# Altium PCB PCB_INST_FONTE.PcbDoc
Units mil, origin at the board's own origin, x right, y up, seen from the top; angles counter-clockwise.
Board outline 2800 x 3030 mil, 2 copper layers (Top Layer, Bottom Layer); 53 components, 31 nets, 151 pads, 6 vias.
Unrouted connection lines stored in the file: 1.
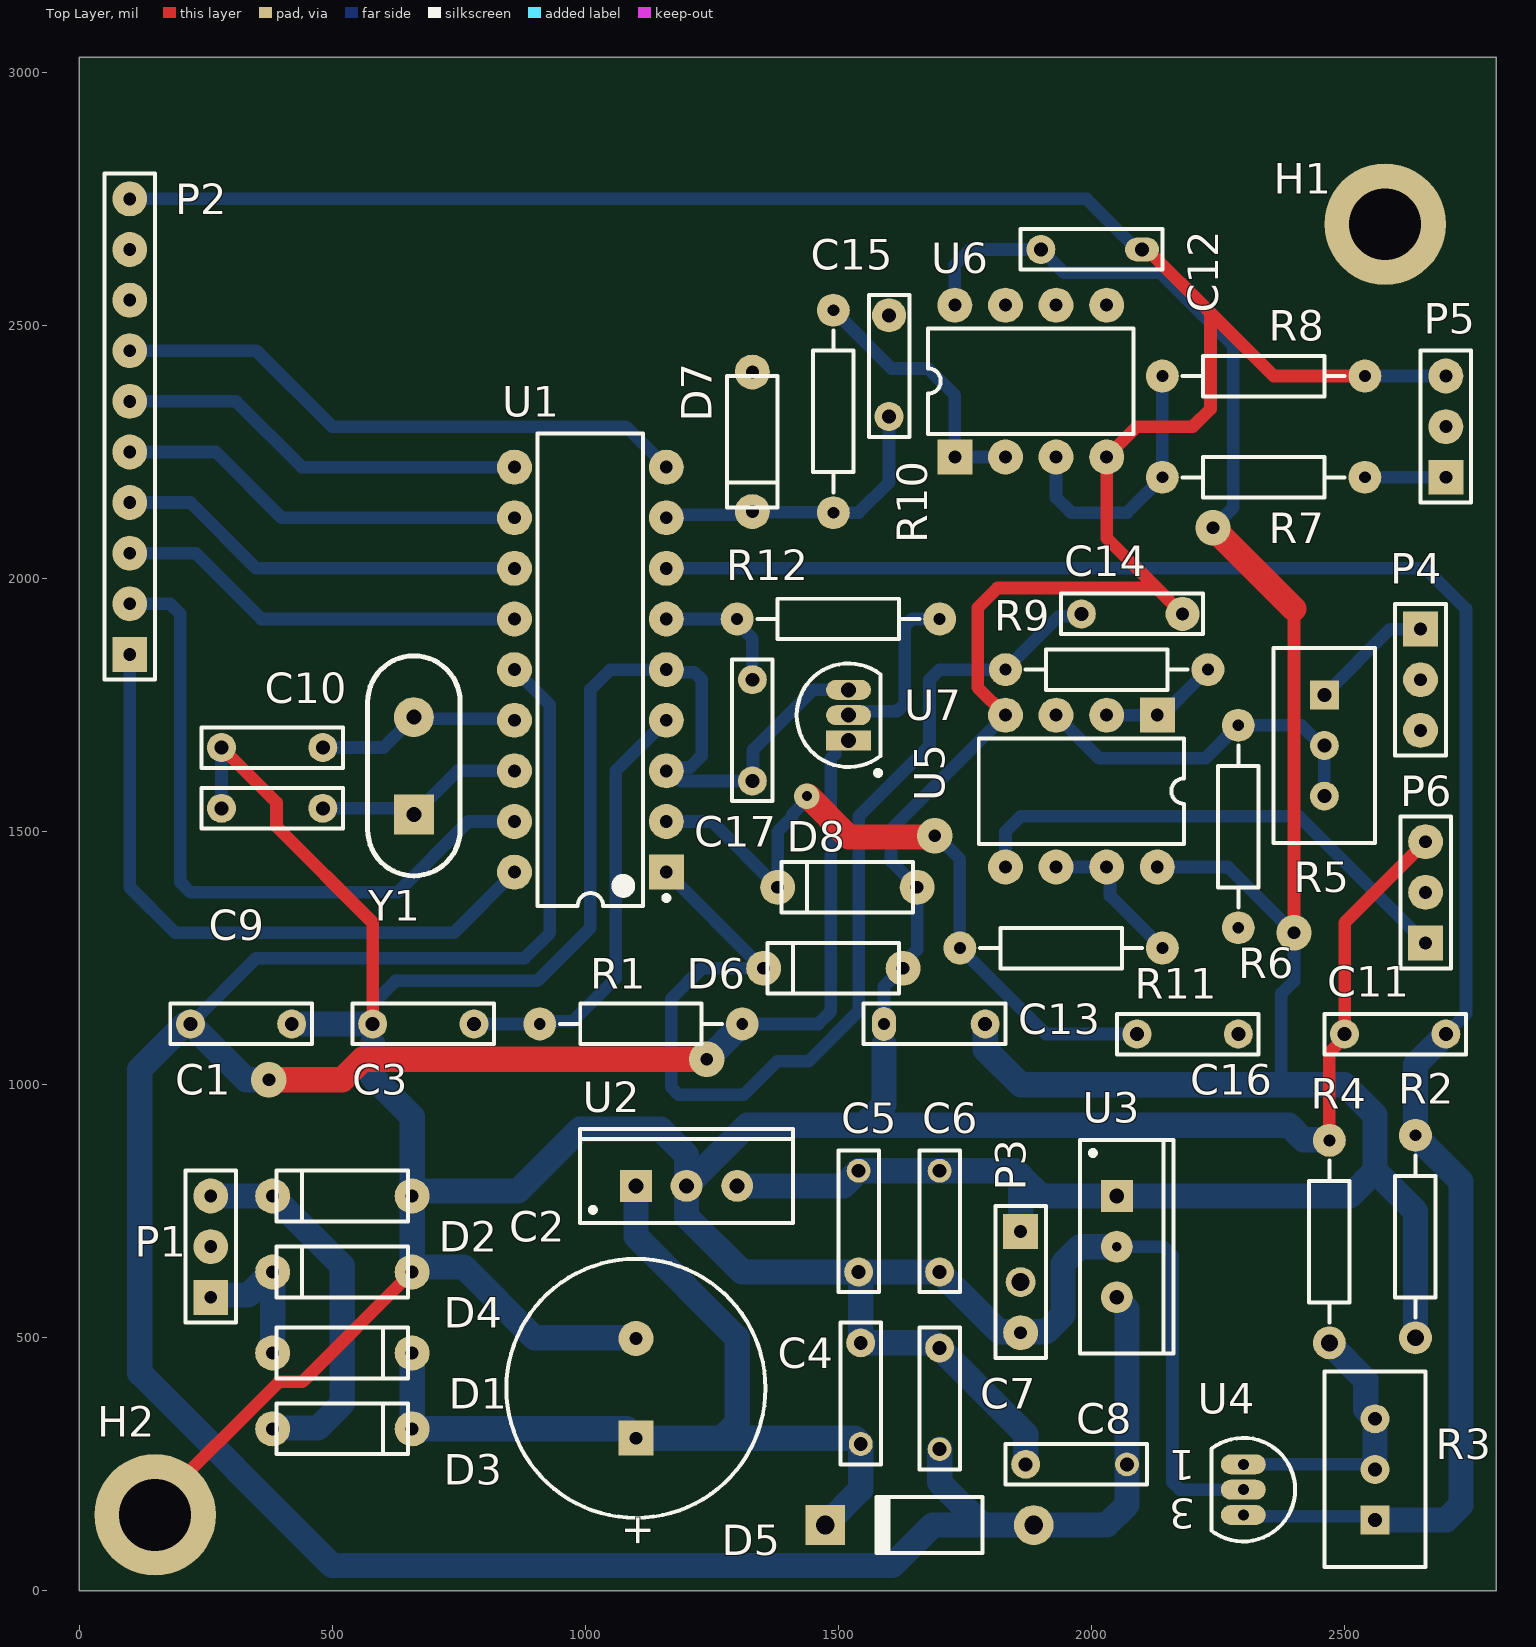
[diagram p0: Top Layer view]
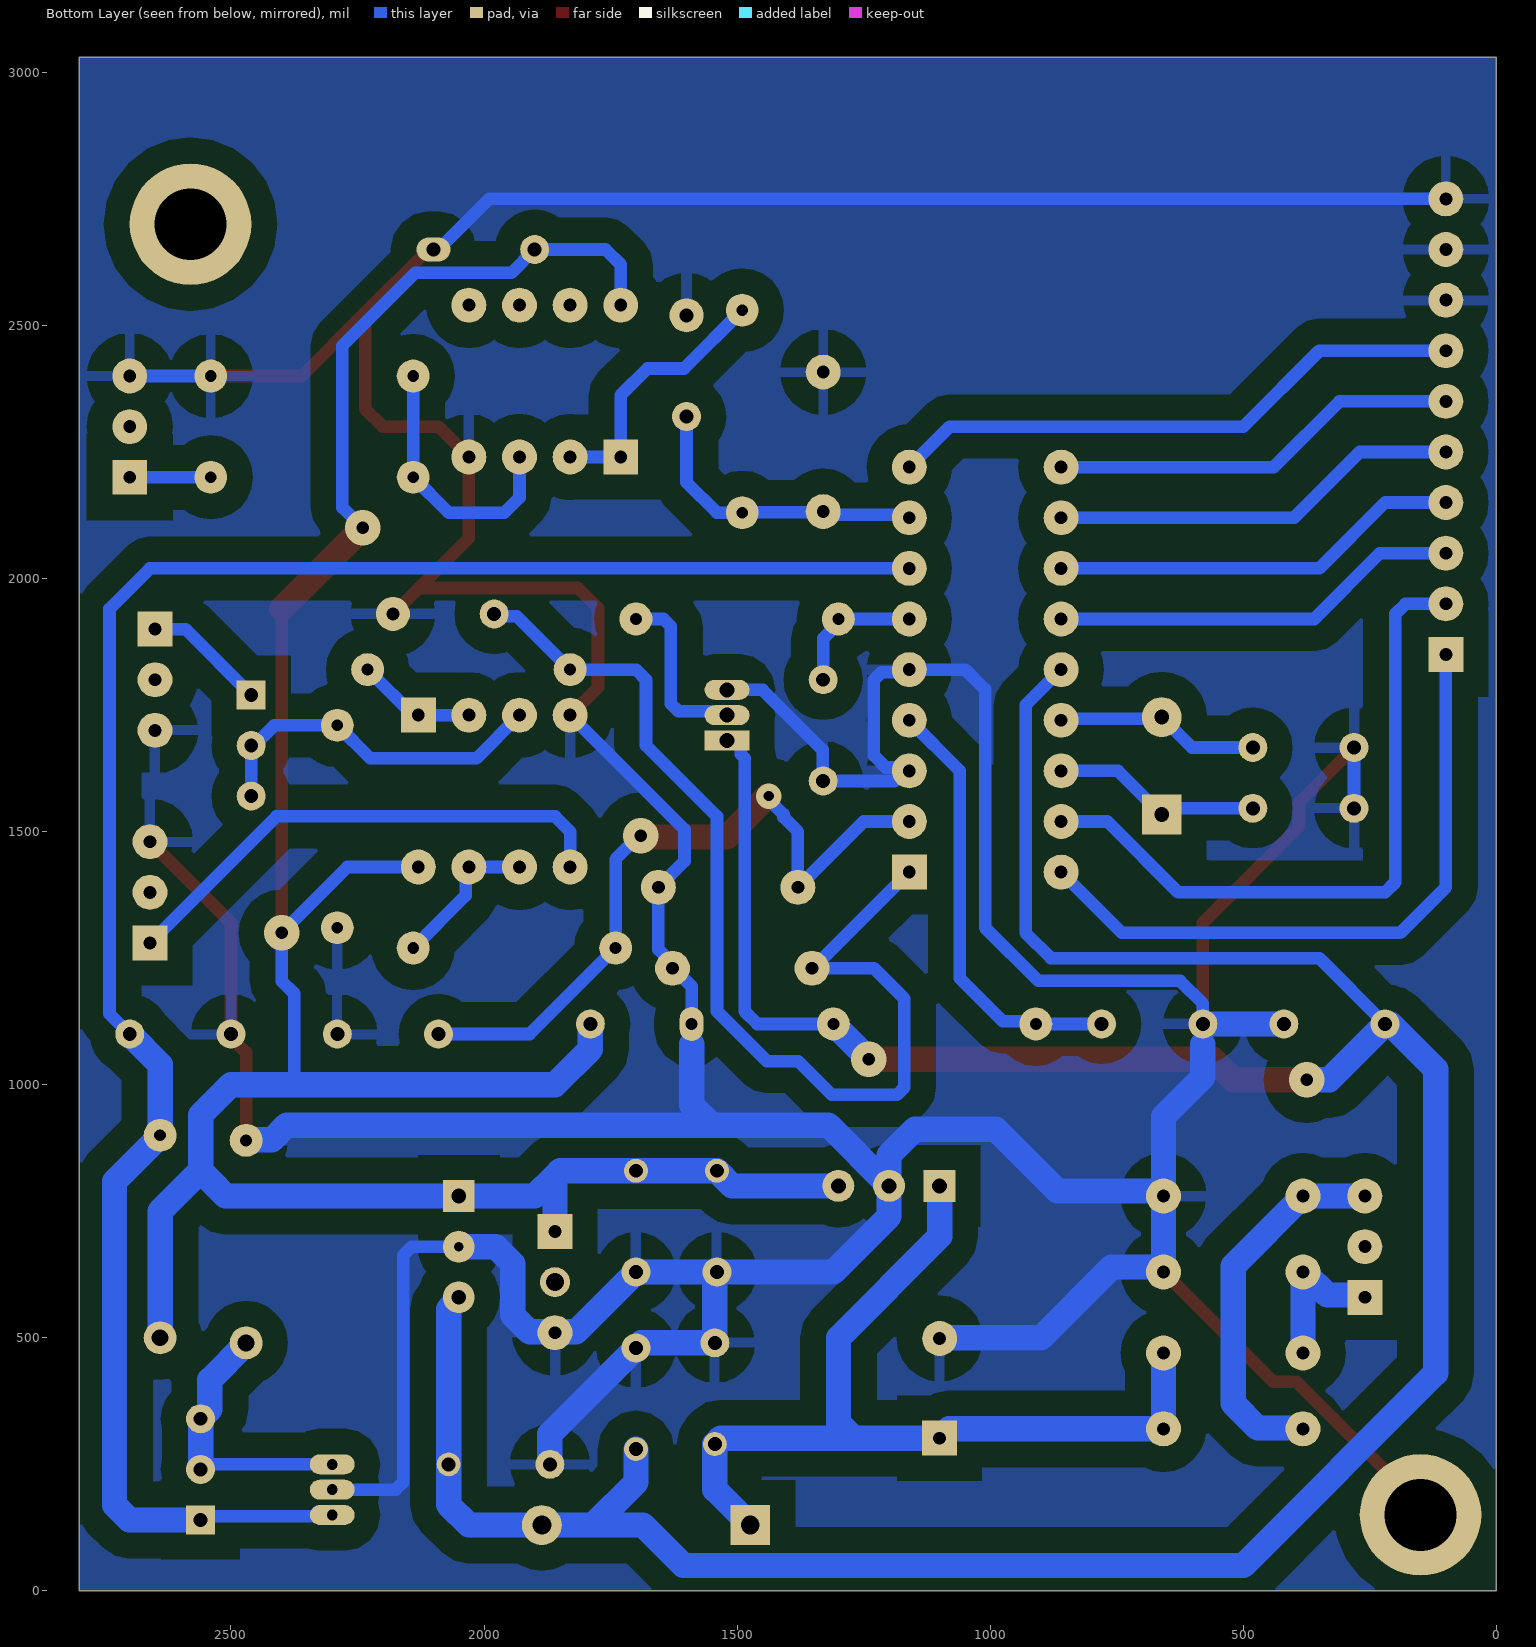
[diagram p1: Bottom Layer view, seen from below]
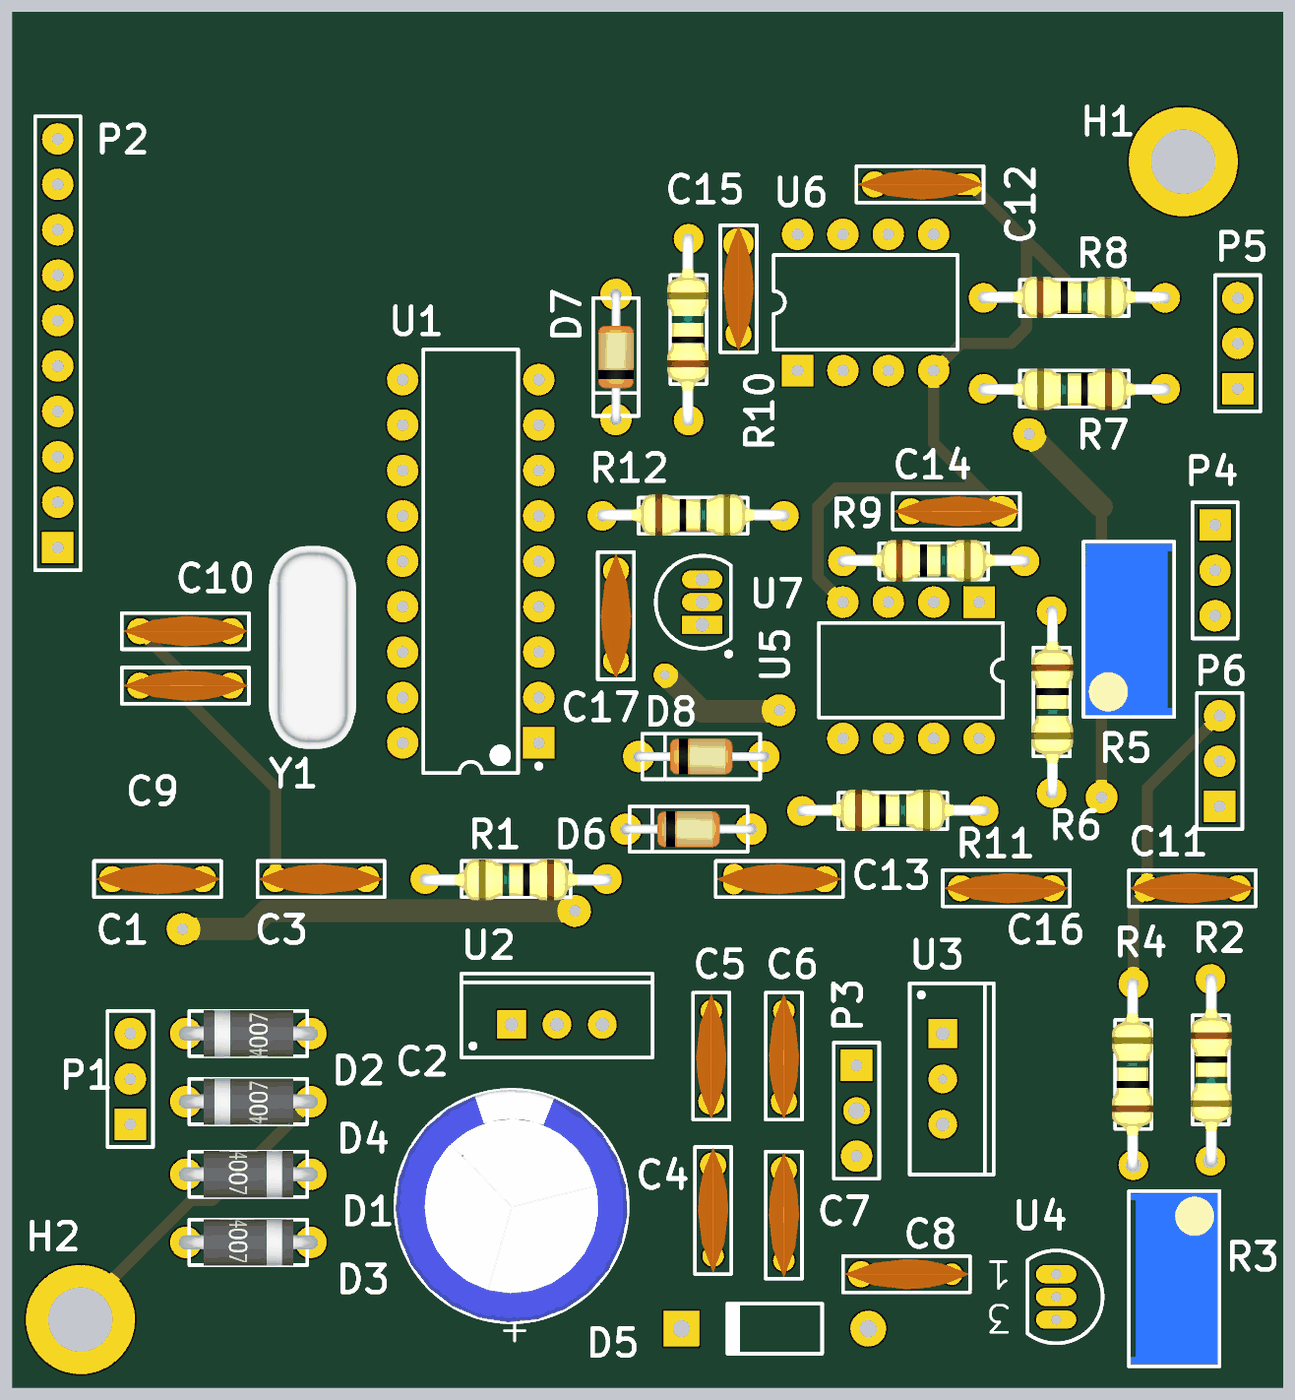
[diagram p2: 3D render of the assembled board from above, using the file's embedded part models]

## Layer stack, top to bottom
Top Solder: solder mask 0.4, Solder Resist, Dk 3.5
Top Layer: signal copper 1.4
Dielectric 1: dielectric 12.6, FR-4, Dk 4.8
Bottom Layer: signal copper 1.4
Bottom Solder: solder mask 0.4, Solder Resist, Dk 3.5

## Board outline
0,0 2800,0 2800,3030 0,3030

## Design rules (kind name [scope] priority, off if disabled: settings)
Clearance [All] p1: gap=10 ignorepadtopadclearanceinfootprint=FALSE except(50: Arc-Poly Track-Poly SMDPad-Poly THPad-Poly Via-Poly Fill-Poly Poly-Poly)
HoleSize [All] p1: absolutevalues=TRUE maxlimit=1000 minlimit=1 maxpercent=80.000 minpercent=20.000
MinimumSolderMaskSliver [All] p1 off: minsoldermaskwidth=10
PlaneClearance PlaneClearance_1 [All] p1: clearance=20
PlaneClearance [All] p2: clearance=50
PolygonConnect [All] p1: connectstyle=Relief reliefconductorwidth=20 reliefentries=4 polygonreliefangle="90 Angle" airgapwidth=50
RoutingCorners [All] p1: cornerstyle=45-Degree minsetback=25 maxsetback=25
RoutingVias [All] p1: holewidth=25 width=50 viastyle="Through Hole" minholewidth=10 minwidth=20 maxholewidth=50 maxwidth=100
SilkToSolderMaskClearance [IsPad] p1 off: minsilkscreentomaskgap=4 clearancetoexposedcopper=TRUE
SolderMaskExpansion [All] p1: expansion=4 istentingtop=FALSE
Width [All] p1: maxlimit=50 minlimit=10 preferedwidth=25
25 further rules are at their usual default settings.

## Classes and differential pairs
net class PowerNets: +12 "AD ref" GND NetC2_1 NetD1_1 NetD3_1 NetR3_2 VCC
component class U_Sheet2: C12 C13 C14 C15 C16 C17 D6 D7 D8 P4 P5 P6 R5 R6 R7 R8 R9 R10 R11 R12 U5 U7
component class U_Sheet1: C1 C2 C3 C4 C5 C6 C7 C8 C9 C10 C11 D1 D2 D3 D4 D5 H1 H2 P1 P2 P3 R1 R2 R3 R4 U2 U3 U4 Y1

## Components (designator, comment, footprint, x,y, rotation, side; value= is the part's Value field where it differs from the comment)
C1 "100nF" RAD-0.2#1 320,1120 r0 top value=1
C2 "2200 uF @25V" CAPPR5-13x21 1100,400 r90 top
C3 "100nF" RAD-0.2#1 680,1120 r180 top value=1
C4 "330nF" RAD-0.2#2 1544.09,390 r90 top value=1
C5 "100nF" RAD-0.2#2 1540,730 r270 top value=1
C6 "330nF" RAD-0.2#2 1700,730 r270 top value=1
C7 "100nF" RAD-0.2#2 1700,380 r90 top value=1
C8 "22pF" RAD-0.2#3 1970,250 r0 top value=1
C9 "22pF" RAD-0.2#1 381.34,1546.06 r0 top value=1
C10 "22pF" RAD-0.2#1 381.34,1666.06 r0 top value=1
C11 "100nF" RAD-0.2#1 2600,1100 r180 top value=1
C12 "100n" RAD-0.2#4 2000,2650 r0 top value=1
C13 "100n" RAD-0.2#5 1690,1120 r180 top value=1
C14 "100n" RAD-0.2#6 2080,1930 r0 top value=1
C15 "100n" RAD-0.2#7 1600,2420 r90 top value=1
C16 "100n" RAD-0.2#1 2190,1100 r0 top value=1
C17 "100n" RAD-0.2#1 1330,1700 r270 top value=1
D1 "1N4007" DIODE-1N400X 520,470 r0 top
D2 "1N4007" DIODE-1N400X 520,630 r180 top
D3 "1N4007" DIODE-1N400X 520,320 r0 top
D4 "1N4007" DIODE-1N400X 520,780 r180 top
D5 "1N4007" DO-41 1680,130 r180 top
D6 "1N4733" DIODE-SIGNAL 1490,1230 r180 top
D7 "1N4733" DIODE-SIGNAL 1330,2270 r270 top
D8 "1N4733" DIODE-SIGNAL 1517.8,1390 r180 top
H1 "Hole" HOLE_M3 2580,2700 r0 top
H2 "Hole" HOLE_M3 150,150 r0 top
P1 "AC(IN)" HDR1X3#1 260,580 r90 top
P2 "LCD 16x2" HDR1X10 100,1850 r90 top
P3 "FAN" HDR1X3#2 1860,710 r270 top
P4 "V var" HDR1X3#1 2650,1900 r270 top
P5 "V fixed" HDR1X3#1 2700,2200 r90 top
P6 "ACS712" HDR1X3#1 2660,1280 r90 top
R1 "4k7" AXIAL-0.4#1 1110,1120 r0 top value=0
R2 "150r" AXIAL-0.4#2 2640,700 r90 top value=0
R3 "24k" VR1 2560,240 r90 top
R4 "12k" AXIAL-0.4#3 2470,690 r270 top value=0
R5 "100k" VR1 2460,1670 r270 top
R6 "6k8" AXIAL-0.4#1 2290,1510 r90 top value=0
R7 "100k" AXIAL-0.4#1 2340,2200 r0 top value=0
R8 "12k" AXIAL-0.4#1 2340,2400 r180 top value=0
R9 "1k" AXIAL-0.4#1 2030,1820 r180 top value=0
R10 "1k" AXIAL-0.4#1 1490,2330 r270 top value=0
R11 "1k" AXIAL-0.4#1 1940,1270 r180 top value=0
R12 "100" AXIAL-0.4#1 1500,1920 r180 top value=0
U1 "PIC18F1220-I/P" PDIP300-P18 1010,1820 r180 top
U2 "LM7812" T03B#1 1200,800 r0 top
U3 "LM7805" T03B#2 2050,680 r270 top
U4 "TL431ACLP" LP03 2300,200 r180 top
U5 "LM358AJG" JG008 1980,1580 r180 top
U6 "LM358AJG" JG008 1880,2390 r0 top
U7 "LM35CAZ" Z03A 1520,1730 r0 top
Y1 "10MHz" CRYSTAL-HC49S 661.34,1533.94 r180 top

## Footprints (in the part's own frame and the unit in brackets; to place one, negate y for a bottom-side part, rotate by r counter-clockwise, add the part's x,y. Pads: shape width x height; smd on the part's side, far side on the other; paste and mask are expansions set on the pad)
AXIAL-0.4#1 [mil]
  round 65.12 hole 23.46: 1(-200,0) 2(200,0)
  silkscreen extent -160,-40 160,40, body extent -212,-47 212,44, height 112
AXIAL-0.4#2 [mil]
  round 65.12 hole 33.46: 1(-200,0)
  round 65.12 hole 23.46: 2(200,0)
  silkscreen extent -160,-40 160,40, body extent -212,-47 212,44, height 112
AXIAL-0.4#3 [mil]
  round 65.12 hole 23.46: 1(-200,0)
  round 65.12 hole 33.46: 2(200,0)
  silkscreen extent -160,-40 160,40, body extent -212,-47 212,44, height 112
CAPPR5-13x21 [mil] "Capacitor, Electrolytic, Radial; Body 13 x 21 mm (Dia.xH typ)"
  rect 69.06x69.06 hole 25.43: 1(-98.43,0)
  round 69.06 hole 25.43: 2(98.43,0)
  silkscreen extent -256,-256 256,256, body extent -256,-256 256,256, height 835
CRYSTAL-HC49S [mm]
  rect 2x2 hole 0.746: 1(0,0)
  round 2 hole 0.746: 2(0,-4.88)
  silkscreen extent -2.32,-7.96 2.32,3.08, body extent -2.34,-8.12 2.31,3.23, height 3.52
DIODE-1N400X [mm]
  round 1.754 hole 0.646: 1(-3.5,0) 2(3.5,0)
  silkscreen extent -3.3,-1.27 3.3,1.27, body extent -3.9,-1.31 3.9,1.31, height 2.81
DIODE-SIGNAL [mm]
  round 1.754 hole 0.646: 1(-3.5,0) 2(3.5,0)
  silkscreen extent -3.3,-1.27 3.3,1.27, body extent -3.75,-1 3.75,1, height 2.2
DO-41 [mm] "Diode, Axial; Body 5.2 x 2.7 mm (LxDia. max), Lead Dia. 0.86 mm (max)"
  round 2 hole 0.946: 1(-5.23,0)
  rect 2x2 hole 0.946: 2(5.23,0)
  silkscreen extent -2.65,-1.4 2.75,1.4
HDR1X3#1 [mil] "Connector; Header; 3 Position"
  rect 69.06x69.06 hole 25.43: 1(0,0)
  round 69.06 hole 25.43: 2(100,0) 3(200,0)
  silkscreen extent -50,-50 250,50
HDR1X3#2 [mil] "Connector; Header; 3 Position"
  rect 69.06x69.06 hole 25.43: 1(0,0)
  round 59.06 hole 35.43: 2(100,0)
  round 69.06 hole 25.43: 3(200,0)
  silkscreen extent -50,-50 250,50
HDR1X10 [mil] "Connector; Header; 10 Position"
  rect 69.06x69.06 hole 25.43: 1(0,0)
  round 69.06 hole 25.43: 2(100,0) 3(200,0) 4(300,0) 5(400,0) 6(500,0) 7(600,0) 8(700,0) 9(800,0) 10(900,0)
  silkscreen extent -50,-50 950,50
HOLE_M3 [mm]
  round 6.1 hole 3.6: 1(0,0)
JG008 [mil] "DIP; 8 Leads; Row Spacing 7.62 mm; Pitch 2.54 mm"
  rect 69.06x69.06 hole 25.43: 1(-150,-150)
  round 69.06 hole 25.43: 2(-50,-150) 3(50,-150) 4(150,-150) 5(150,150) 6(50,150) 7(-50,150) 8(-150,150)
  silkscreen extent -203,-104 203,104
LP03 [mm] "TO, Flat Index; 3 In-Line, Axial Leads; Body Dia. 4.8mm; Leads 0.56 x 0.41 mm (max)"
  oval 2.254x1 hole 0.546: 1(0,-1.27) 2(0,0) 3(0,1.27)
  silkscreen extent -2.6,-2.6 1.6,2.6
PDIP300-P18 [mil] "DIP, 18-Leads, Row Spacing 7.62mm, Pitch 2.54mm, Body 22.9x6.6mm"
  rect 69.06x69.06 hole 25.43: 1(-150,400)
  round 69.06 hole 25.43: 2(-150,300) 3(-150,200) 4(-150,100) 5(-150,0) 6(-150,-100) 7(-150,-200) 8(-150,-300) 9(-150,-400) 10(150,-400) 11(150,-300) 12(150,-200) 13(150,-100) 14(150,0) 15(150,100) 16(150,200) 17(150,300) 18(150,400)
  silkscreen extent -155,-467 104,467, body extent -142,-465 142,465, height 210
RAD-0.2#1 [mm]
  round 1.454 hole 0.7: 1(-2.54,0) 2(2.54,0)
  silkscreen extent -3.56,-1.02 3.56,1.02, body extent -3.5,-0.85 3.5,0.85, height 7.31
RAD-0.2#2 [mm]
  round 1.2 hole 0.7: 1(-2.54,0)
  round 1.454 hole 0.7: 2(2.54,0)
  silkscreen extent -3.56,-1.02 3.56,1.02, body extent -3.5,-0.85 3.5,0.85, height 7.31
RAD-0.2#3 [mm]
  round 1.454 hole 0.7: 1(-2.54,0)
  round 1.2 hole 0.7: 2(2.54,0)
  silkscreen extent -3.56,-1.02 3.56,1.02, body extent -3.5,-0.85 3.5,0.85, height 7.31
RAD-0.2#4 [mm]
  round 1.454 hole 0.7: 1(-2.54,0)
  oval 1.708x1.2 hole 0.7: 2(2.54,0)
  silkscreen extent -3.56,-1.02 3.56,1.02, body extent -3.5,-0.85 3.5,0.85, height 7.31
RAD-0.2#5 [mm]
  round 1.454 hole 0.7: 1(-2.54,0)
  oval 1.2x1.708 hole 0.598: 2(2.54,0)
  silkscreen extent -3.56,-1.02 3.56,1.02, body extent -3.5,-0.85 3.5,0.85, height 7.31
RAD-0.2#6 [mm]
  round 1.454 hole 0.7: 1(-2.54,0)
  round 1.708 hole 0.649: 2(2.54,0)
  silkscreen extent -3.56,-1.02 3.56,1.02, body extent -3.5,-0.85 3.5,0.85, height 7.31
RAD-0.2#7 [mm]
  round 1.454 hole 0.7: 1(-2.54,0)
  round 1.708 hole 0.7: 2(2.54,0)
  silkscreen extent -3.56,-1.02 3.56,1.02, body extent -3.5,-0.85 3.5,0.85, height 7.31
T03B#1 [mm] "TO, Thru-Hole, Vertical, Heatsink Mounted; 3 In-Line Leads; Pitch 2.54 mm"
  rect 1.6x1.6 hole 0.746: 1(-2.54,0)
  round 1.6 hole 0.746: 2(0,0) 3(2.54,0)
  silkscreen extent -5.35,-1.85 5.35,2.85, body extent -5.4,-1.9 5.4,2.9, height 19.4
T03B#2 [mm] "TO, Thru-Hole, Vertical, Heatsink Mounted; 3 In-Line Leads; Pitch 2.54 mm"
  rect 1.6x1.6 hole 0.746: 1(-2.54,0)
  round 1.6 hole 0.492: 2(0,0)
  round 1.6 hole 0.746: 3(2.54,0)
  silkscreen extent -5.35,-1.85 5.35,2.85, body extent -5.4,-1.9 5.4,2.9, height 19.4
VR1 [mm]
  rect 1.454x1.454 hole 0.7: 1(-2.54,0)
  round 1.454 hole 0.7: 2(0,0) 3(2.54,0)
  silkscreen extent -4.9,-2.54 4.9,2.54, body extent -4.76,-2.41 4.77,2.42, height 11.6
Z03A [mm] "TO, Flat Index; 3 In-Line, Axial Leads; Body Dia. 5mm; Leads 0.55 x 0.50 mm (max)"
  rect 2.254x1 hole 0.75: 1(0,-1.27)
  oval 2.254x1 hole 0.75: 2(0,0) 3(0,1.27)
  silkscreen extent -2.6,-3.02 1.61,2.6, body extent -2.6,-2.61 1.6,2.61, height 5.2

## Part data
C1 C3 C4 C5 C6 C7 C8 C9 C10 C11 C12 C13 C14 C15 C16 C17: library part C, "Capacitor"
C2: library part CP, "Polarized Capacitor"
D1 D2 D3 D4: library part D, "Diode"
D5: library part "Diode 1N4007", "1 Amp General Purpose Rectifier", Code_JEDEC=DO-204-AL, ComponentLink1Description="Manufacturer Link", ComponentLink1URL=http://www.fairchildsemi.com/, ComponentLink2Description=Datasheet, ComponentLink2URL=http://www.fairchildsemi.com/ds/1N%2F1N4001.pdf, DatasheetVersion=1998, LatestRevisionDate=17-Jul-2002, LatestRevisionNote="Re-released for DXP Platform.", PackageDescription="Diode, Axial; Body 5.2 x 2.7 mm (LxDia. max), Lead Dia. 0.86 mm (max)", PackageReference=DO-41, PackageVersion=Aug-1999, Published=8-Jun-2000, Publisher="Altium Limited"
D6 D7 D8: library part "D Zener", "Zener Diode"
P1 P3 P4 P5 P6: library part "Header 3", "Header, 3-Pin", LatestRevisionDate=17-Jul-2002, LatestRevisionNote="Re-released for DXP Platform.", Publisher="Altium Limited"
P2: library part "Header 10", "Header, 10-Pin", LatestRevisionDate=17-Jul-2002, LatestRevisionNote="Re-released for DXP Platform.", Publisher="Altium Limited"
R1 R2 R4 R6 R7 R8 R9 R10 R11 R12: library part R, "Resistor"
R3 R5: library part "R Pot", "Potentiometer"
U1: "High Performance, Enhanced Flash Microcontroller with 10-Bit A/D and nanoWatt Technology, 4K Flash, 18-Pin PDIP, Industrial Temperature", Supplier Part Number 1=PIC18F1220-I/P-ND, Code_JEDEC=MS-001, ComponentLink1Description=Datasheet, ComponentLink1URL=http://ww1.microchip.com/downloads/en/DeviceDoc/39605F.pdf, ComponentLink2Description="Packaging Specification", ComponentLink2URL=http://www.microchip.com/stellent/groups/techpub_sg/documents/packagingspec/en012702.pdf, ComponentLink3Description="Microchip.com Home", ComponentLink3URL=http://www.microchip.com/, DatasheetVersion="revF, Feb-2007", LatestRevisionDate=29-Jan-2009, LatestRevisionNote="Sch. layout revised. 3D Model Removed.", PackageDescription="18-Lead Plastic Dual In-Line (P) - 300 mil Body [PDIP]", PackageReference=PDIP300-P18, PackageVersion="revBB, Aug-2009", Published=11-Oct-2004, Publisher="Altium Limited", Supplier 1=Digi-Key, Supplier 2=Farnell, Supplier 3=Farnell, Supplier Part Number 2=9761977, Supplier Part Number 3=9771450
U2 U3: library part LM7808CT, "Series 3-Terminal Positive Regulators, 3-pin TO-220", Manufacturer="National Semiconductor", PackageTopMarking=NSUZXYTTE#*LM7808CT, Supplier Part Number 1=9490248, ComponentLink1Description="LM340 Datasheet", ComponentLink1URL=http://www.national.com/ds/LM/LM340.pdf, ComponentLink2Description="LM340 Web Page", ComponentLink2URL=http://www.national.com/pf/LM/LM340.html, ComponentLink3Description="T03B Package Page", ComponentLink3URL=http://www.national.com/packaging/folders/t03b.html, CompType="LDO IC", DatasheetVersion=Jul-2006, PackageDescription="TO-220, Molded, 3 Lead, Straight", PackageReference=T03B, PackageVersion="revL, Jan-1992", PartNumber=LM7808CT, PinCount=3, Published=4-Dec-2008, Publisher="Altium Limited", RoHS=O, Supplier 1=Farnell
U4: "Adjustable Precision Shunt Regulator", Code_JEDEC=TO-226-AA, ComponentLink1Description="Manufacturer Link", ComponentLink1URL=http://www.ti.com/, ComponentLink2Description=Datasheet, ComponentLink2URL=http://www-s.ti.com/sc/ds/tl431a.pdf, DatasheetVersion=Oct-2000, LatestRevisionDate=06-Jun-2005, LatestRevisionNote="Sch pins 1 & 3 swapped", PackageDescription="TO, Flat Index; 3 In-Line, Axial Leads; Body Dia. 4.8mm; Leads 0.56 x 0.41 mm (max)", PackageReference=LP03, PackageVersion=Nov-2001, Published=15-Apr-2002, Publisher="Altium Limited"
U5 U6: "Dual Operational Amplifier", ComponentLink1Description="Manufacturer Link", ComponentLink1URL=http://www.ti.com/, DatasheetVersion=Aug-1988, LatestRevisionDate=04-Mar-2005, LatestRevisionNote="Stylized 3D Model Added.", PackageDescription="DIP; 8 Leads; Row Spacing 7.62 mm; Pitch 2.54 mm", PackageReference=JG008, PackageVersion=Jan-1995, Published=15-Apr-2002, Publisher="Altium Limited"
U7: "Precision Centigrade Temperature Sensor, 3-pin TO-92", Manufacturer="National Semiconductor", PackageTopMarking=NSXYTT*LM35*CAZ, PowerWise=N, Supplier Part Number 1=9494529, Code_JEDEC=TO-226-AA, ComponentLink1Description="LM35 Datasheet", ComponentLink1URL=http://www.national.com/ds/LM/LM35.pdf, ComponentLink2Description="LM35 Web Page", ComponentLink2URL=http://www.national.com/pf/LM/LM35.html, ComponentLink3Description="Z03A Package Page", ComponentLink3URL=http://www.national.com/packaging/folders/z03a.html, CompType="Temp Sensor IC", DatasheetVersion=Nov-2000, LatestRevisionDate=15-Jul-2009, LatestRevisionNote="Sch pins 1 & 3 reversed.", PackageDescription="TO-92, Molded, 3 Lead", PackageReference=Z03A, PackageVersion="revG, Sep-2000", PartNumber=LM35CAZ, PinCount=3, Published=4-Dec-2008, Publisher="Altium Limited", RoHS=N, Supplier 1=Farnell
Y1: library part XTAL, "Crystal Oscillator"

## Via types
v1: diameter 70, hole 25, Top Layer to Bottom Layer, 5 vias
v2: diameter 50, hole 20, Top Layer to Bottom Layer, 1 vias

## Nets (pads, with @x,y where several pads share a name; then routed paths per layer and width w, separated by ;. In a path a pad name is that pad's centre, name@x,y a point inside that pad or via, vN(x,y) a via of type N, cw(c..) or ccw(c..) an arc to the next point about the centre after c; other vN are vias at no path point)
+12: C5.1 C6.1 C12.1 C13.1 P3.1 R2.1 U2.3 U3.1 U5.8 U6.8 | length 5375.6
  Top Layer w25: v1(2400,1300) 2400,1940
  Top Layer w50: v1(2240,2100) 2400,1940
  Bottom Layer w25: U6.8 1730,2620 1760,2650 C12.1 1946.12,2603.88 2136.12,2603.88 2280,2460 2280,2140 v1(2240,2100) ; U5.8 2270,1430 v1(2400,1300) 2400,1204.96 2375.04,1180 2375.04,1014.96 2390,1000
  Bottom Layer w50: U2.3 1510,800 C5.1 C6.1 1850,830 1860,820 ; C13.1 1790,1070 1860,1000 2390,1000 2500,1000 2560,940 2560,830 ; P3.1 1860,820 ; R2.1 2640,750 2560,830 ; 1860,820 1900,780 U3.1 2510.71,780 2540,809.29 2540,810 2560,830
"AD ref": C11.1 R2.2 R3.1 U1.7 U4.3 | length 3907.7
  Bottom Layer w25: U1.7 2660,2020 2740,1940 2740,1140 C11.1 ; U4.3 U4.3@2320.56,150 ; U4.3@2320.56,147.25 2552.75,147.25 R3.1
  Bottom Layer w50: R3.1 2700.71,140 2730,169.29 2730,808.62 2640,898.62 R2.2 2640,1040 C11.1
GND: C1.2 C2.2 C3.2 C4.2 C5.2 C6.2 C7.2 C8.1 C9.1 C10.1 C11.2 C12.2 C13.2 C14.2 C15.2 C16.2 C17.2 D2.1 D4.1 D6.1 D7.1 D8.1 H2.1 P2.8 P2.9 P2.10 P3.3 P4.3 P5.3 P6.3 R4.1 R6.1 R8.1 U1.3 U1.5 U2.2 U3.2 U4.2 U5.4 U6.4 U7.3 | length 14868.8
  Top Layer w25: H2.1 150,168.44 394.53,412.97 440.77,412.97 D2.1 ; C10.1 390,1557.4 390,1510 580,1320 C3.2 ; U5.4 1774.94,1785.06 1774.94,1941.63 1814.43,1981.12 2128.88,1981.12 ; C12.2 2110,2650 2234.94,2525.06 ; C14.2 2128.88,1981.12 ; R4.1 2470,1063.98 2500,1093.98 C11.2 2500,1320 P6.3 ; R8.1 2360,2400 2234.94,2525.06 ; 2128.88,1981.12 2030,2080 U6.4 2090,2300 2200,2300 2234.94,2334.94 2234.94,2525.06
  Bottom Layer w25: P2.10 1990,2750 2090,2650 C12.2 ; C9.1 C10.1 ; 580,1080 C3.2 580,1160 625,1205 905,1205 1010,1310 1010,1780.63 1049.37,1820 U1.5 1165.36,1814.64 1215.36,1814.64 1230,1800 1230,1650 1206.52,1626.52 1166.52,1626.52 U1.3 1169.22,1620 1189.22,1600 C17.2 1331.12,1601.12 1331.12,1661.12 1450,1780 U7.3 ; C13.2 1590,1194.49 D6.1@1627.8,1232.29 ; D6.1 D6.1@1627.8,1232.29 ; D6.1@1637.8,1242.29 D6.1@1637.8,1249.22 ; U5.4 1604.03,1504.03 1604.03,1441.56 D8.1 1655.59,1267.01 D6.1@1637.8,1249.22 ; U3.2 2142.52,680 2160,662.52 2160,214.64 2174.64,200 U4.2 ; R6.1@2285.4,1305.4 R6.1 ; C11.2 C11.2@2504.26,1104.26 ; R8.1 P5.3 ; D6.1@1627.8,1232.29 1627.8,1239.22 D6.1@1637.8,1249.22
  Bottom Layer w50: C1.2 C3.2 ; 580,1080 580,1015.12 657.8,937.33 657.8,790 867.17,790 989.37,912.2 1148.82,912.2 1200,861.02 U2.2 ; D2.1 D2.1@657.8,640 ; D4.1 D2.1@657.8,640 ; C2.2 1098.43,500 900,500 760,640 D2.1@657.8,640 ; 1590,1080 1590,960 1550,920 ; C8.1 1870,310 C7.2 1690,490 C4.2 1544.09,625.91 C5.2 ; U3.2 1977.17,680 1943.58,646.42 1943.58,545.32 1910,511.73 1861.73,511.73 P3.3 1858.27,511.73 1818.27,511.73 C6.2 C5.2 ; R4.1 2469.02,890.98 2419.02,890.98 2390,920 1550,920 ; U2.2 1200,740 1310,630 C5.2 ; U2.2 1320,920 1550,920
LCD_D4: P2.4 U1.12 | length 813.8
  Bottom Layer w25: P2.4 220,2150 350,2020 U1.12
LCD_D5: P2.7 U1.9 | length 1155.3
  Bottom Layer w25: P2.7 350,2450 500,2300 1080,2300 U1.9
LCD_D6: P2.2 U1.17 | length 1364.6
  Bottom Layer w25: P2.2 180,1950 200,1930 200,1400 220,1380 628.66,1380 768.66,1520 U1.17
LCD_D7: P2.1 U1.18 | length 1307
  Bottom Layer w25: P2.1 100,1390 190,1300 740,1300 U1.18
LCD_EN: P2.5 U1.11 | length 813.8
  Bottom Layer w25: P2.5 270,2250 400,2120 U1.11
LCD_RS: P2.6 U1.10 | length 813.8
  Bottom Layer w25: P2.6 310,2350 440,2220 U1.10
NetC2_1: C2.1 C4.1 D1.2 D3.2 D5.2 U2.1 | length 1831.4
  Bottom Layer w50: D1.2 D3.2 1081.57,320 C2.1 1270,301.57 ; U2.1 1100,700 1300,500 1300,331.57 1270,301.57 ; D5.2 1544.09,200 C4.1 1532.52,301.57 1270,301.57
NetC14_1: C14.1 D6.2 R9.2 U1.1 | length 2162.4
  Bottom Layer w25: U1.1 D6.2@1350,1230 ; D6.2 D6.2@1350,1230 ; C14.1 1975.74,1925.74 1935.74,1925.74 R9.2 1700,1820 1680,1800 1680,1670 1540,1530 1540,1145 1441.61,1046.61 1379.43,1046.61 1312.82,980 1184.64,980 1170,994.64 1170,1170 1230,1230 D6.2@1350,1230
NetC15_1: C15.1 D7.2 R10.2 U1.8 | length 600.8
  Bottom Layer w25: U1.8 1166.1,2126.1 1323.9,2126.1 D7.2 1331.1,2131.1 1488.9,2131.1 R10.2 1540,2130 1600,2190 C15.1
NetC16_1: C16.1 D8.2 R11.2 U1.2 | length 1429.8
  Top Layer w25: v2(1437.66,1570) v2@1439.64,1570 ; v1@1687.74,1489.33 v1(1690.32,1491.9)
  Top Layer w50: v2@1439.64,1570 1520.31,1489.33 v1@1687.74,1489.33
  Bottom Layer w25: U1.2 1250,1520 D8.2 1380,1500 1408.47,1528.47 1408.47,1534.05 1437.66,1563.24 v2(1437.66,1570) ; v1(1690.32,1491.9) 1693.77,1491.9 1740,1445.67 R11.2 1910,1100 C16.1
NetC17_1: C17.1 R12.2 U1.6 | length 272.4
  Bottom Layer w25: U1.6 R12.2 1300,1911.85 1330,1881.85 C17.1
NetD1_1: D1.1 D2.2 P1.1 | length 305.4
  Bottom Layer w50: P1.1 264.53,584.53 334.28,584.53 379.75,630 D2.2 D1.1 D1.1@379.75,470
NetD3_1: D3.1 D4.2 P1.3 | length 747.8
  Bottom Layer w50: P1.3 D4.2 520,642.2 520,370 471.73,321.73 383.94,321.73 D3.1
NetP4_1: P4.1 R5.1 | length 243.8
  Bottom Layer w25: R5.1 2590,1900 P4.1
NetP5_1: P5.1 R7.2 | length 160
  Bottom Layer w25: R7.2 P5.1
NetP6_1: P6.1 U5.5 | length 1016
  Bottom Layer w25: U5.5 1830,1500 1860,1530 2410,1530 P6.1
NetR3_2: R3.2 R3.3 R4.2 U4.1 | length 551.4
  Bottom Layer w25: U4.1 2543.98,250 2553.98,240 R3.2
  Bottom Layer w50: R4.2 2470,488.62 2541.69,416.93 2541.69,358.31 R3.3 R3.2
NetR5_2: R5.2 R5.3 R6.2 U5.3 | length 709
  Bottom Layer w25: U5.3 2015.33,1644.67 2224.67,1644.67 R6.2 2413.98,1710 2453.98,1670 R5.2 R5.3
NetR7_1: R7.1 R8.2 U6.3 | length 531.4
  Bottom Layer w25: U6.3 1930,2160 1960,2130 2070,2130 R7.1 R8.2
NetR9_1: R9.1 U5.1 U5.2 | length 389.9
  Bottom Layer w25: U5.2 U5.1 ; U5.1@2120,1710 R9.1 U5.1@2135,1725
NetR10_1: R10.1 U6.1 U6.2 | length 531.7
  Bottom Layer w25: R10.1 1605,2415 1677.24,2415 1730,2362.24 U6.1 U6.2
NetR11_1: R11.1 U5.6 U5.7 | length 305.6
  Bottom Layer w25: U5.6 U5.7 2036.52,1423.48 2036.52,1373.48 R11.1
NetR12_1: R12.1 U7.2 | length 348.3
  Bottom Layer w25: U7.2 1543.57,1730 1551.39,1737.82 1616.29,1737.82 1630.93,1752.46 1630.93,1905.36 1645.58,1920 R12.1
OSC1: C9.2 U1.16 Y1.1 | length 419.3
  Bottom Layer w25: C9.2 649.21,1546.06 Y1.1 747.4,1620 U1.16
OSC2: C10.2 U1.15 Y1.2 | length 406
  Bottom Layer w25: C10.2 601.34,1666.06 Y1.2 664.37,1723.03 856.97,1723.03 U1.15
PIC_RB7: P2.3 U1.13 | length 813.8
  Bottom Layer w25: P2.3 230,2050 360,1920 U1.13
RST: C3.1 R1.1 U1.4 | length 868.7
  Bottom Layer w25: C3.1 R1.1 915.06,1125.06 975.06,1125.06 1060,1210 1060,1620 U1.4
VCC: C1.1 C7.1 C8.2 D5.1 R1.2 U1.14 U3.3 U7.1 | length 6748.4
  Top Layer w50: v1(375,1010) 520,1010 560,1050 v1(1240,1050)
  Bottom Layer w25: C1.1 350,1250 880,1250 930,1300 930,1750 U1.14 ; R1.2 1460,1120 1485.16,1145.16 1485.16,1645.16 1493.13,1653.13 1493.13,1672.81 1500.32,1680 U7.1
  Bottom Layer w50: C1.1@209.29,1120 120,1030.71 120,430 500,50 1606.36,50 1686.36,130 1784.33,130 ; C1.1 330,1010 v1(375,1010) ; v1(1240,1050) R1.2 ; C7.1 1700,214.33 1784.33,130 ; U3.3 2050,576.48 2070,556.48 C8.2 2070,170 2030,130 D5.1 1784.33,130
pads on no net: H1.1 P1.2 P3.2 P4.2 P5.2 P6.2 U6.5 U6.6 U6.7

## Polygon pours and split planes (outlines as drawn)
GND on Bottom Layer "GND_L02_P003" (solid, pour order 3): 0,0 0,3030 2800,3030 2800,0
GND on Bottom Layer "GND_PLANE" (solid, pour order 2): 3190,1340

## Silkscreen, mask and mechanical layers (free items; w line width, h text height)
Mechanical 1:
  the board outline again, w10
Mechanical 13:
  pour cut-out: 200,200

## Text inside footprints (layer, text, board x,y; h text height)
C2: Top Overlay "+" at 1129.61,85.04 h59.06 r90
U4: Top Overlay "3" at 2204.68,181.61 h59.05 r180; Top Overlay "1" at 2204.68,277.91 h59.05 r180